# EAGLE board TinkCad_Arduino (EAGLE 9.7.0)

Size 147.8 x 116.19 mm. Coordinates in mm from the lower left corner, seen from the top.
Outline: 0,0 147.8,0 147.8,116.19 0,116.19 0,0
Copper layers (1*16): Top 0.035mm / dielectric 1.5mm / Bottom 0.035mm
Design rules "default": minimum track width 6mil, minimum drill 0.35mm, track to track 6mil, track to pad 6mil, pad to pad 6mil, via to via 6mil, smd to smd 6mil, copper to edge 40mil, drill to drill 6mil, minimum pad ring 10mil, minimum via ring 8mil, stop-mask expansion 4mil, vias tented up to drill 0mil, thermal gap 10mil

## Footprints (pad centres in the part's own frame; a part is rotated, then mirrored left to right if it is on the bottom)
LEDRD254W60D565H860B = drill 0.981 pad 1.581: 1 -1.27,0; 2 1.27,0
PIEZO = drill 1 pad 1.6: 1 -3.5,0; 2 3.5,0
RESAD1016W63L850D250B = drill 0.83 pad 1.43: 1 -5.08,0; 2 5.08,0
ARDUINO-UNO-R3-SHIELD = drill 1.016 pad 1.88: 3.3V 24.13,-2.54; 5V 24.13,0; A0 24.13,12.7; A1 24.13,15.24; A2 24.13,17.78; A3 24.13,20.32; A4 24.13,22.86; A5 24.13,25.4; AREF -24.13,-13.97; D2 -24.13,20.32; D3 -24.13,17.78; D4 -24.13,15.24; D5 -24.13,12.7; D6 -24.13,10.16; D7 -24.13,7.62; D8 -24.13,3.81; D9 -24.13,1.27; D10 -24.13,-1.27; D11 -24.13,-3.81; D12 -24.13,-6.35; D13 -24.13,-8.89; GND@0 24.13,2.54; GND@1 24.13,5.08; GND@2 -24.13,-11.43; IOREF 24.13,-7.62; NC 24.13,-10.16; RES 24.13,-5.08; RX -24.13,25.4; SCL -24.13,-19.05; SDA -24.13,-16.51; TX -24.13,22.86; VIN 24.13,7.62

## Placement (x,y rotation side)
D3  RED  [LEDRD254W60D565H860B]  45.22,81.82 180 top
D4  RED  [LEDRD254W60D565H860B]  52.84,81.82 180 top
D5  RED  [LEDRD254W60D565H860B]  60.46,81.82 180 top
D12  RED  [LEDRD254W60D565H860B]  118.88,81.82 180 top
D13  RED  [LEDRD254W60D565H860B]  141.74,81.82 180 top
D14  RED  [LEDRD254W60D565H860B]  126.5,81.82 180 top
D15  RED  [LEDRD254W60D565H860B]  134.12,81.82 180 top
PIEZO1  PIEZO  [PIEZO]  32.52,94.52 0 top
R1  1k  [RESAD1016W63L850D250B]  51.57,107.22 90 top
R3  1k  [RESAD1016W63L850D250B]  43.95,107.22 90 top
R4  1k  [RESAD1016W63L850D250B]  38.87,107.22 90 top
R5  1k  [RESAD1016W63L850D250B]  59.19,107.22 90 top
R9  1k  [RESAD1016W63L850D250B]  117.61,107.22 90 top
R10  1k  [RESAD1016W63L850D250B]  125.23,107.22 90 top
R11  1k  [RESAD1016W63L850D250B]  132.85,107.22 90 top
R12  1k  [RESAD1016W63L850D250B]  140.47,107.22 90 top
U1  ARDUINO-UNO-R3-SHIELD  [ARDUINO-UNO-R3-SHIELD]  47.88,29.84 270 top

## Library data of the parts
D3-D5 D12-D15 = Tinkercad; CATEGORY: Opto-Electronic; SUB-CATEGORY: LED; VALUE: LED_RED
PIEZO1 R1 R3-R5 R9-R12 U1 = Tinkercad

## Nets
D3_C: D3.2 R3.1
D4_C: D4.2 R1.1
D5_C: D5.2 R5.1
D12_C: D12.2 R9.1
D13_C: D13.2 R12.1
D14_C: D14.2 R10.1
D15_C: D15.2 R11.1
PIEZO1_2: PIEZO1.2 R4.1
U1_D2: D13.1 U1.D2
U1_D3: D15.1 U1.D3
U1_D4: D14.1 U1.D4
U1_D5: D12.1 U1.D5
U1_D8: PIEZO1.1 U1.D8
U1_D9: D5.1 U1.D9
U1_D10: D4.1 U1.D10
U1_D11: D3.1 U1.D11
U1_GND: R1.2 R3.2 R4.2 R5.2 R9.2 R10.2 R11.2 R12.2 U1.GND@0 U1.GND@1 U1.GND@2

## Tracks (layer width: path | path; a pad name or v marks a point on that pad's centre or on a via)
D3_C  (1 unrouted)
D4_C  (1 unrouted)
D5_C  (1 unrouted)
D12_C  (1 unrouted)
D13_C  (1 unrouted)
D14_C  (1 unrouted)
D15_C  (1 unrouted)
PIEZO1_2  (1 unrouted)
U1_D2  (1 unrouted)
U1_D3  (1 unrouted)
U1_D4  (1 unrouted)
U1_D5  (1 unrouted)
U1_D8  (1 unrouted)
U1_D9  (1 unrouted)
U1_D10  (1 unrouted)
U1_D11  (1 unrouted)
U1_GND  (10 unrouted)